# Altium PCB 232转CAN.PcbDoc
Units mil, origin at the board's own origin, x right, y up, seen from the top; angles counter-clockwise.
Board outline 905.51 x 787.4 mil, 2 copper layers (Top Layer, Bottom Layer); 28 components, 35 nets, 119 pads, 19 vias.
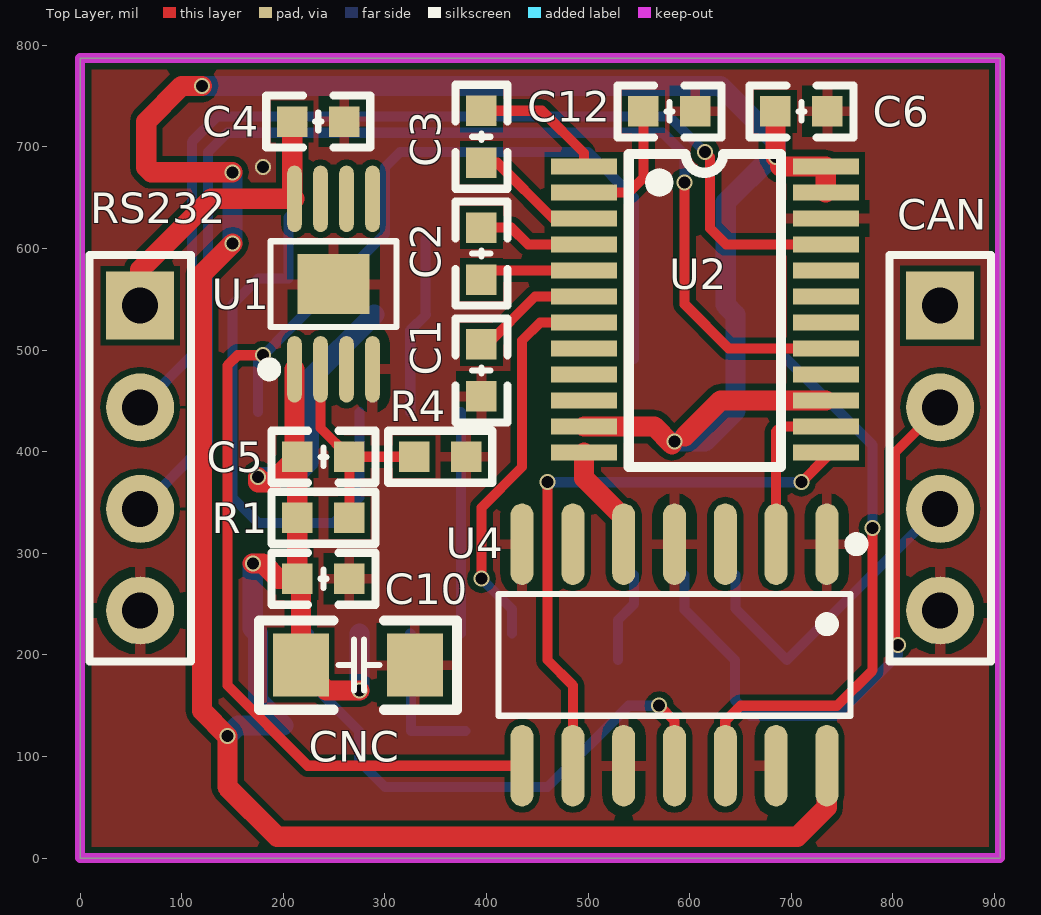
[diagram p0: Top Layer view]
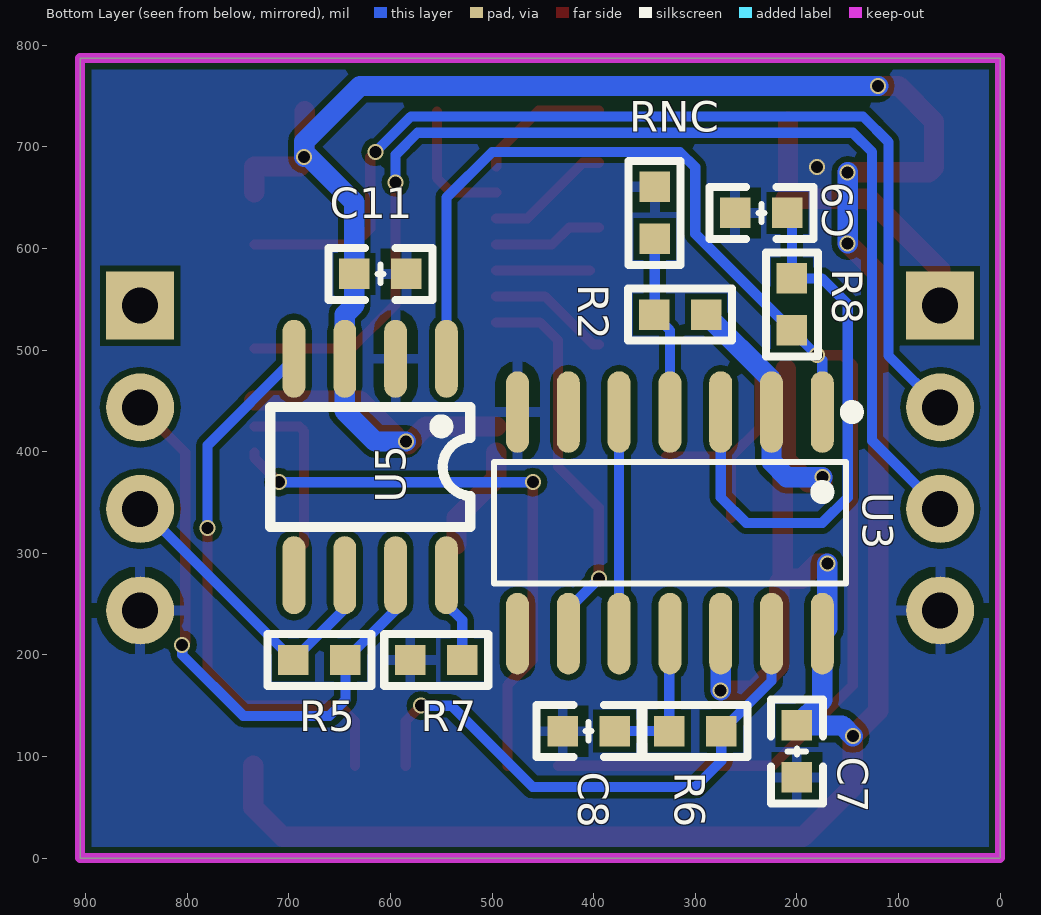
[diagram p1: Bottom Layer view, seen from below]

## Layer stack, top to bottom
Top Solder: solder mask 0.4, Solder Resist, Dk 3.5
Top Layer: signal copper 1.4
Dielectric 1: dielectric 12.6, FR-4, Dk 4.8
Bottom Layer: signal copper 1.4
Bottom Solder: solder mask 0.4, Solder Resist, Dk 3.5

## Board outline
0,0 905.51,0 905.51,787.4 0,787.4

## Design rules (kind name [scope] priority, off if disabled: settings)
Clearance [All] p1: gap=6 ignorepadtopadclearanceinfootprint=FALSE except(0: Arc-Hole Track-Hole SMDPad-Hole THPad-Hole Via-Hole Fill-Hole Poly-Hole Region-Hole Text-Hole)
PolygonConnect [All] p1: connectstyle=Relief reliefconductorwidth=10 reliefentries=4 polygonreliefangle="90 Angle" airgapwidth=10
RoutingVias [All] p1: holewidth=11.81 width=15.75 viastyle="Through Hole" minholewidth=11.81 minwidth=15.75 maxholewidth=11.81 maxwidth=15.75
SolderMaskExpansion [All] p1: expansion=4 istentingtop=FALSE
Width [All] p1: maxlimit=30 minlimit=10 preferedwidth=10
30 further rules are at their usual default settings.

## Components (designator, comment, footprint, x,y, rotation, side; value= is the part's Value field where it differs from the comment)
C1 "330nF" C0603_L 395,480 r270 top
C2 "330nF" C0603_L 395,595 r90 top
C3 "47nF" C0603_L 395,710 r90 top
C4 "1uF" C0603_L 234.41,725 r180 top
C5 "104" C0603_L 239.41,395 r180 top
C6 "104" C0603_L 710,735 r180 top
C7 "104" C0603_L 200,105 r270 bottom
C8 "104" C0603_L 405,125 r0 bottom
C9 "104" C0603_L 235,635 r180 bottom
C10 "1uF" C0603_L 239.41,275 r180 top
C11 "104" C0603_L 610,575 r180 bottom
C12 "330nF" C0603_L 580,735 r0 top
CAN "HDR-1X4" HDR2.54-LI-4P 846.46,393.7 r270 top
CNC "1206" C1206_L 274.41,190 r180 top
R1 "5.76K" R0603_L 239.41,335 r180 top
R2 "10K" R0603_L 315,535 r180 bottom
R4 "2K" R0603_L 354.41,395 r180 top
R5 "120R" R0603_L 670,195 r0 bottom
R6 "10R" R0603_L 300,125 r180 bottom
R7 "47.5K" R0603_L 555,195 r180 bottom
R8 "1.21K" R0603_L 205,545 r90 bottom
RNC "NC" R0603_L 340,635 r90 bottom
RS232 "HDR-1X4" HDR2.54-LI-4P 59.06,393.7 r270 top
U1 "LT3010EMS8E#TRPBF/ C579990" LT3010EMS8E#TRPBF/sop8-ep 249.41,565 r0 top
U2 "MAX3387EEUG" MAX3387EEUG/tssop24 615,540 r270 top
U3 "MC74HC74AD/C7345/SOIC14" 74HCT125/SOIC14 325,330 r0 bottom
U4 "74HCT125/C5962" 74HCT125/SOIC14 585,200 r180 top
U5 "LT1796IS8#TRPBF/C665326" LT1796IS8#TRPBF/C665326 620,385 r0 bottom

## Footprints (in the part's own frame and the unit in brackets; to place one, negate y for a bottom-side part, rotate by r counter-clockwise, add the part's x,y. Pads: shape width x height; smd on the part's side, far side on the other; paste and mask are expansions set on the pad)
74HCT125/SOIC14 [mil]
  oval 22.6x80.24 smd: 1(-150,-109.02) 2(-100,-109.02) 3(-50,-109.02) 4(0,-109.02) 5(50,-109.02) 6(100,-109.02) 7(150,-109.02) 8(150,109.02) 9(100,109.02) 10(50,109.02) 11(0,109.02) 12(-50,109.02) 13(-100,109.02) 14(-150,109.02)
  silkscreen extent -185,-115 173,60
C0603_L [mil] "无极性贴片电容"
  rect 30x30 smd: 1(-25.59,0) 2(25.59,0)
  silkscreen extent -51,-26 51,26, body extent -31,-16 31,16, height 32
C1206_L [mil] "无极性贴片电容"
  rect 55x62 smd: 1(-55.12,0) 2(57.09,0)
  silkscreen extent -96,-44 98,44, body extent -63,-32 63,32, height 48
HDR2.54-LI-4P [mm] "排针，4脚"
  rect 1.7x1.7 hole 0.9: 1(-3.81,0)
  round 1.7 hole 0.9: 2(-1.27,0) 3(1.27,0) 4(3.81,0)
  silkscreen extent -5.08,-1.27 5.08,1.27, body extent -5.08,-1.27 5.08,1.27, height 8.5
LT1796IS8#TRPBF/C665326 [mil]
  oval 22.38x76.78 smd: 1(-75,-106.5) 2(-25,-106.5) 3(25,-106.5) 4(75,-106.5) 5(75,106.5) 6(25,106.5) 7(-25,106.5) 8(-75,106.5)
  silkscreen extent -98,-59 98,59
LT3010EMS8E#TRPBF/sop8-ep [mm]
  oval 0.364x1.662 smd: 1(-0.975,-2.131) 2(-0.325,-2.131) 3(0.325,-2.131) 4(0.975,-2.131) 5(0.975,2.131) 6(0.325,2.131) 7(-0.325,2.131) 8(-0.975,2.131)
  rect 1.8x1.5 smd: 9(0,0)
  silkscreen extent -1.76,-2.28 1.58,1.07
MAX3387EEUG/tssop24 [mm]
  rect 0.4x1.65 smd: 1(-3.575,-3.023) 2(-2.925,-3.023) 3(-2.275,-3.023) 4(-1.625,-3.023) 5(-0.975,-3.023) 6(-0.325,-3.023) 7(0.325,-3.023) 8(0.975,-3.023) 9(1.625,-3.023) 10(2.275,-3.023) 11(2.925,-3.023) 12(3.575,-3.023) 13(3.575,3.023) 14(2.925,3.023) 15(2.275,3.023) 16(1.625,3.023) 17(0.975,3.023) 18(0.325,3.023) 19(-0.325,3.023) 20(-0.975,3.023) 21(-1.625,3.023) 22(-2.275,3.023) 23(-2.925,3.023) 24(-3.575,3.023)
  silkscreen extent -3.89,-1.9 3.94,1.91
R0603_L [mil] "1/10W贴片电阻                 淘宝ID:黄晶宝石"
  rect 30x30 smd: 1(-25.59,0) 2(25.59,0)
  silkscreen extent -51,-26 51,26, body extent -31,-16 32,16, height 16

## Part data
C1 C2 C3 C4 C6 C7 C8 C9 C10 C11 C12 CNC: library part C-MLCC, "独石电容"
C5: library part C, "贴片电容"
CAN RS232: library part "Header 4", "4P接插件"
R1 R2 R4 R5 R6 R7 R8 RNC: library part R, "贴片电阻"

## Via types
v1: diameter 15.75, hole 11.81, Top Layer to Bottom Layer, 19 vias

## Nets (pads, with @x,y where several pads share a name; then routed paths per layer and width w, separated by ;. In a path a pad name is that pad's centre, name@x,y a point inside that pad or via, vN(x,y) a via of type N, cw(c..) or ccw(c..) an arc to the next point about the centre after c; other vN are vias at no path point)
1A: U2.14 U4.2 | length 162
  Top Layer w10: U4.2 685,420 689.84,424.84 U2.14
2A: U2.12 U4.5 | length 106
  Top Layer w20: U2.12@496,398.84 496,374 535,335 U4.5
3A: U2.13 U4.9 | length 578.6
  Top Layer w10: v1(460,370) 460,195 485,170 U4.9 ; v1(710,370) 734,394 U2.13
  Bottom Layer w10: v1(460,370) v1(710,370)
3Y: R8.1 U3.1 U4.8 U5.1 | length 1398.2
  Top Layer w10: v1(180,495) 155,495 145,485 145,170 224.02,90.98 U4.8
  Bottom Layer w10: U3.1 175,490 v1(180,495) ; v1@180.3,494.7 R8.1 300,614.41 300,680 315,695 500,695 545,650 U5.1
4A: U4.12 U5.4 | length 551.4
  Top Layer w10: U4.12 635,135 650,150 745,150 780,185 v1(780,325)
  Bottom Layer w10: U5.4 780,406.5 v1(780,325)
4Y: R6.2 U3.13 U4.11 | length 550.4
  Top Layer w10: v1(570,150) 585,135 U4.11
  Bottom Layer w10: U3.13 225,174.41 R6.2 274.41,95.59 300,70 460,70 540,150 v1(570,150)
5V: C5.2 C6.2 C7.1 C10.2 C11.1 CNC.2 R1.2 R2.2 U1.1 U2.11 U2.15 U2.23 U2.24 U3.2 U3.12 U3.14 U4.14 U5.3 | length 3784.9
  Top Layer w20: v1(120,760) 100,760 65,725 65,680 70,675 v1(150,675) ; v1(150,605) 120,575 120,145 v1(145,120) 145,70 194,21 706,21 735,50 U4.14 ; v1(170,290) 180,290 195,275 C10.2 ; v1(175,375) 175,370 188.82,370 C5.2 R1.2 C10.2 ; C5.2@211.02,397.8 U1.1 ; v1(275,165) 242.32,165 CNC.2 217.32,271.5 C10.2 ; U2.11 565.16,424.84 v1@582.5,407.5 ; 595,415 630.43,450.43 U2.15 ; v1@684.41,690 C6.2 ; 689.26,680.74 U2.24 U2.23
  Bottom Layer w20: v1(120,760) 630,760 685,705 v1(685,690) 680,690 635.59,645.59 C11.1 635.59,544.41 645,535 U5.3 645,440 615,410 v1(585,410) ; v1(145,120) 155.59,130.59 C7.1 175,155.6 U3.14 170,225.98 v1(170,290) ; v1(150,605) v1(150,675) ; v1(175,375) 210,375 225,390 U3.2 225,470.58 R2.2 ; v1(275,165) U3.12
+12V: CAN.1
CANH: CAN.2 R5.1 U5.7 | length 598.6
  Top Layer w10: v1(805,210) 801.99,213.01 801.99,399.24 CAN.2
  Bottom Layer w10: U5.7 595,244.41 R5.1 644.41,155.59 660,140 745,140 805,200 v1(805,210)
CANL: CAN.3 R5.2 U5.6 | length 316.9
  Bottom Layer w10: U5.6 645,245.59 R5.2 844.29,343.7 CAN.3
DB9公2: U2.8
DB9公7: U4.6
DB9公8: U2.10
DB9公9: U4.3
DB9母2: RS232.2 U2.21 | length 1010
  Top Layer w10: v1(615,695) 620,690 620,620 636.03,603.97 U2.21
  Bottom Layer w10: RS232.2 110,494.65 110,705 135,730 580,730 v1(615,695)
DB9母3: RS232.3 U2.17 | length 1169.2
  Top Layer w10: v1(595,665) 595,545 638.39,501.61 U2.17
  Bottom Layer w10: RS232.3 126,410.65 126,695 145,714 573.37,714 595,692.37 v1(595,665)
DB9母4: U2.18
DB9母6: U2.20
DB9母7: U2.16
DB9母8: U2.19
GND: C1.2 C4.1 C6.1 C7.2 C8.2 C9.1 C10.1 C11.2 C12.2 CAN.4 CNC.1 R4.1 R7.1 RNC.2 RS232.4 U1.4 U1.9 U2.22 U3.7 U4.1 U4.4 U4.7 U4.10 U4.13 U5.2
  other v1: 180,680
NetC1_1: C1.1 U2.6 | length 120.6
  Top Layer w10: C1.1 400.59,505.59 447.79,552.79 U2.6
NetC2_1: C2.1 U2.5 | length 92
  Top Layer w10: C2.1@403.98,578.38 U2.5
NetC2_2: C2.2 U2.4 | length 107.9
  Top Layer w10: C2.2 424.41,620.59 441.03,603.97 U2.4
NetC3_1: C3.1 U2.3 | length 123.7
  Top Layer w10: C3.1 410.59,684.41 465.44,629.56 U2.3
NetC3_2: C3.2 U2.1 | length 131.5
  Top Layer w10: C3.2 454.41,735.59 496,694 U2.1
NetC5_1: C5.1 R1.1 R4.2 U1.2 | length 221.7
  Top Layer w10: U1.2 236.62,423.38 C5.1 ; R1.1 C5.1 ; R4.2 C5.1
NetC8_1: C8.1 R6.1 U3.11 | length 150
  Bottom Layer w10: U3.11 325.59,220.39 R6.1 C8.1
NetC9_2: C9.2 R8.2 U3.3 | length 551.6
  Bottom Layer w10: C9.2 205,630.58 R8.2 175.59,570.59 150,545 150,355 175,330 250,330 275,355 U3.3
NetC12_1: C12.1 U2.2 | length 129.9
  Top Layer w10: U2.2 540.15,655.15 554.41,669.41 C12.1
NetR2_1: R2.1 RNC.1 U3.4 | length 176.2
  Bottom Layer w10: U3.4 325,519.4 R2.1 ; R2.1@340,535.59 RNC.1
NetR7_2: R7.2 U5.8 | length 90
  Bottom Layer w10: R7.2 529.41,234.41 545,250 U5.8
Q1: U3.5 U3.10 | length 218
  Bottom Layer w10: U3.10 U3.5
Q2: U2.7 U3.9 | length 385.8
  Top Layer w10: v1(395,275) 395,345 435,385 435,509.42 452.79,527.21 U2.7
  Bottom Layer w10: v1(395,275) 425,245 U3.9
VIN: C4.2 RS232.1 U1.8 | length 293.3
  Top Layer w20: RS232.1 59.06,579.06 128.9,648.9 U1.8 208.82,651.09 C4.2
pads on no net: U1.3 U1.5 U1.6 U1.7 U2.9 U3.6 U3.8 U5.5

## Polygon pours and split planes (outlines as drawn)
GND on Top Layer "Bottom Layer-No Net" (solid, pour order 4): 0,0 0,787.4 905.51,787.4 905.51,0
GND on Bottom Layer "Bottom Layer-No Net" (solid, pour order 6): 0,0 0,787.4 905.51,787.4 905.51,0.51 900,-5 900,0

## Keep-outs
Keep-Out Layer:
  the board outline again, w10